# Altium PCB sm_Arm_Board.PcbDoc
Units mil, origin at the board's own origin, x right, y up, seen from the top; angles counter-clockwise.
Board outline 1531 x 1354 mil, 2 copper layers (Top Layer, Bottom Layer); 15 components, 21 nets, 85 pads, 16 vias.
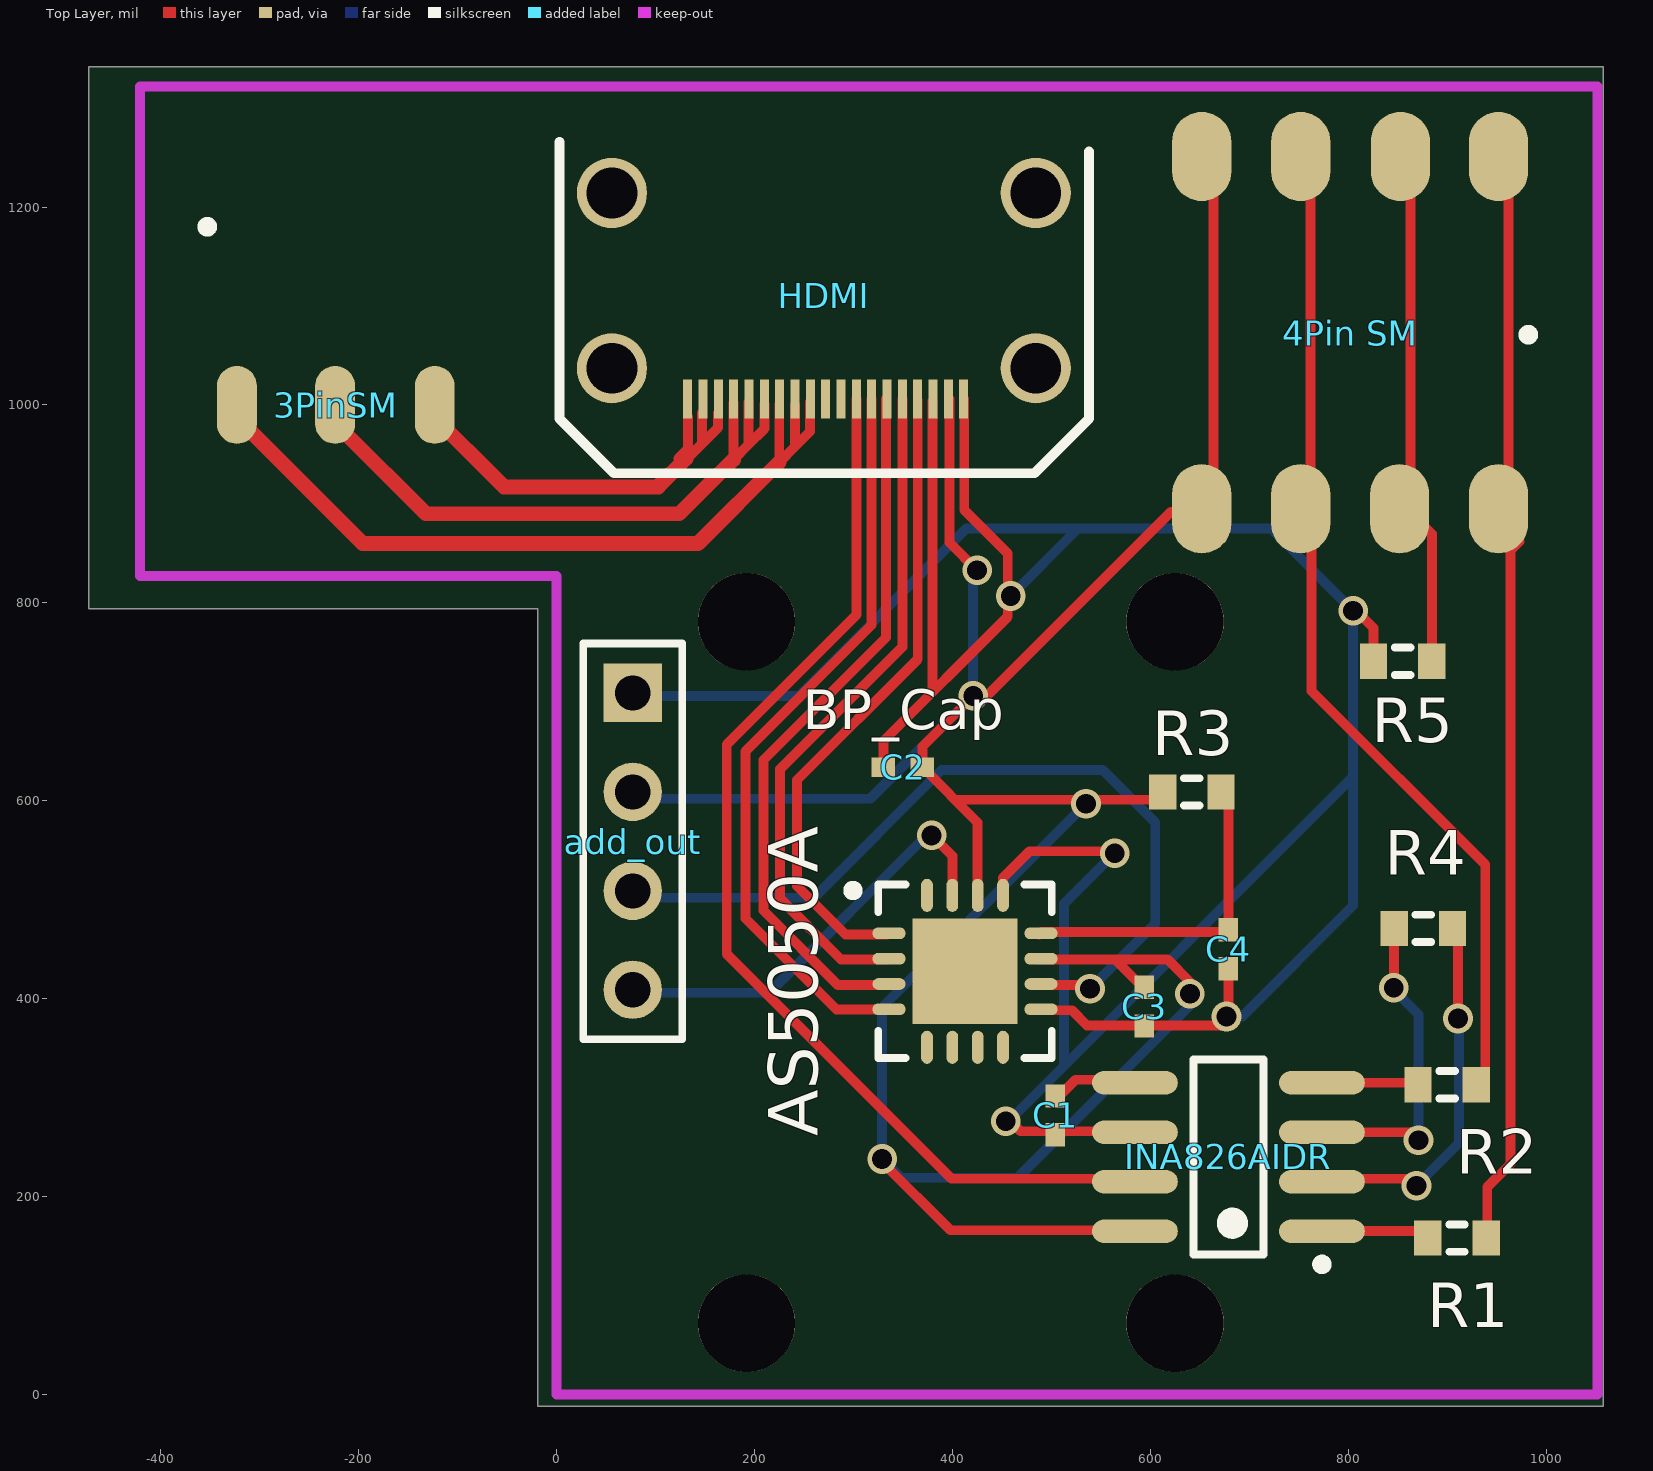
[diagram p0: Top Layer view]
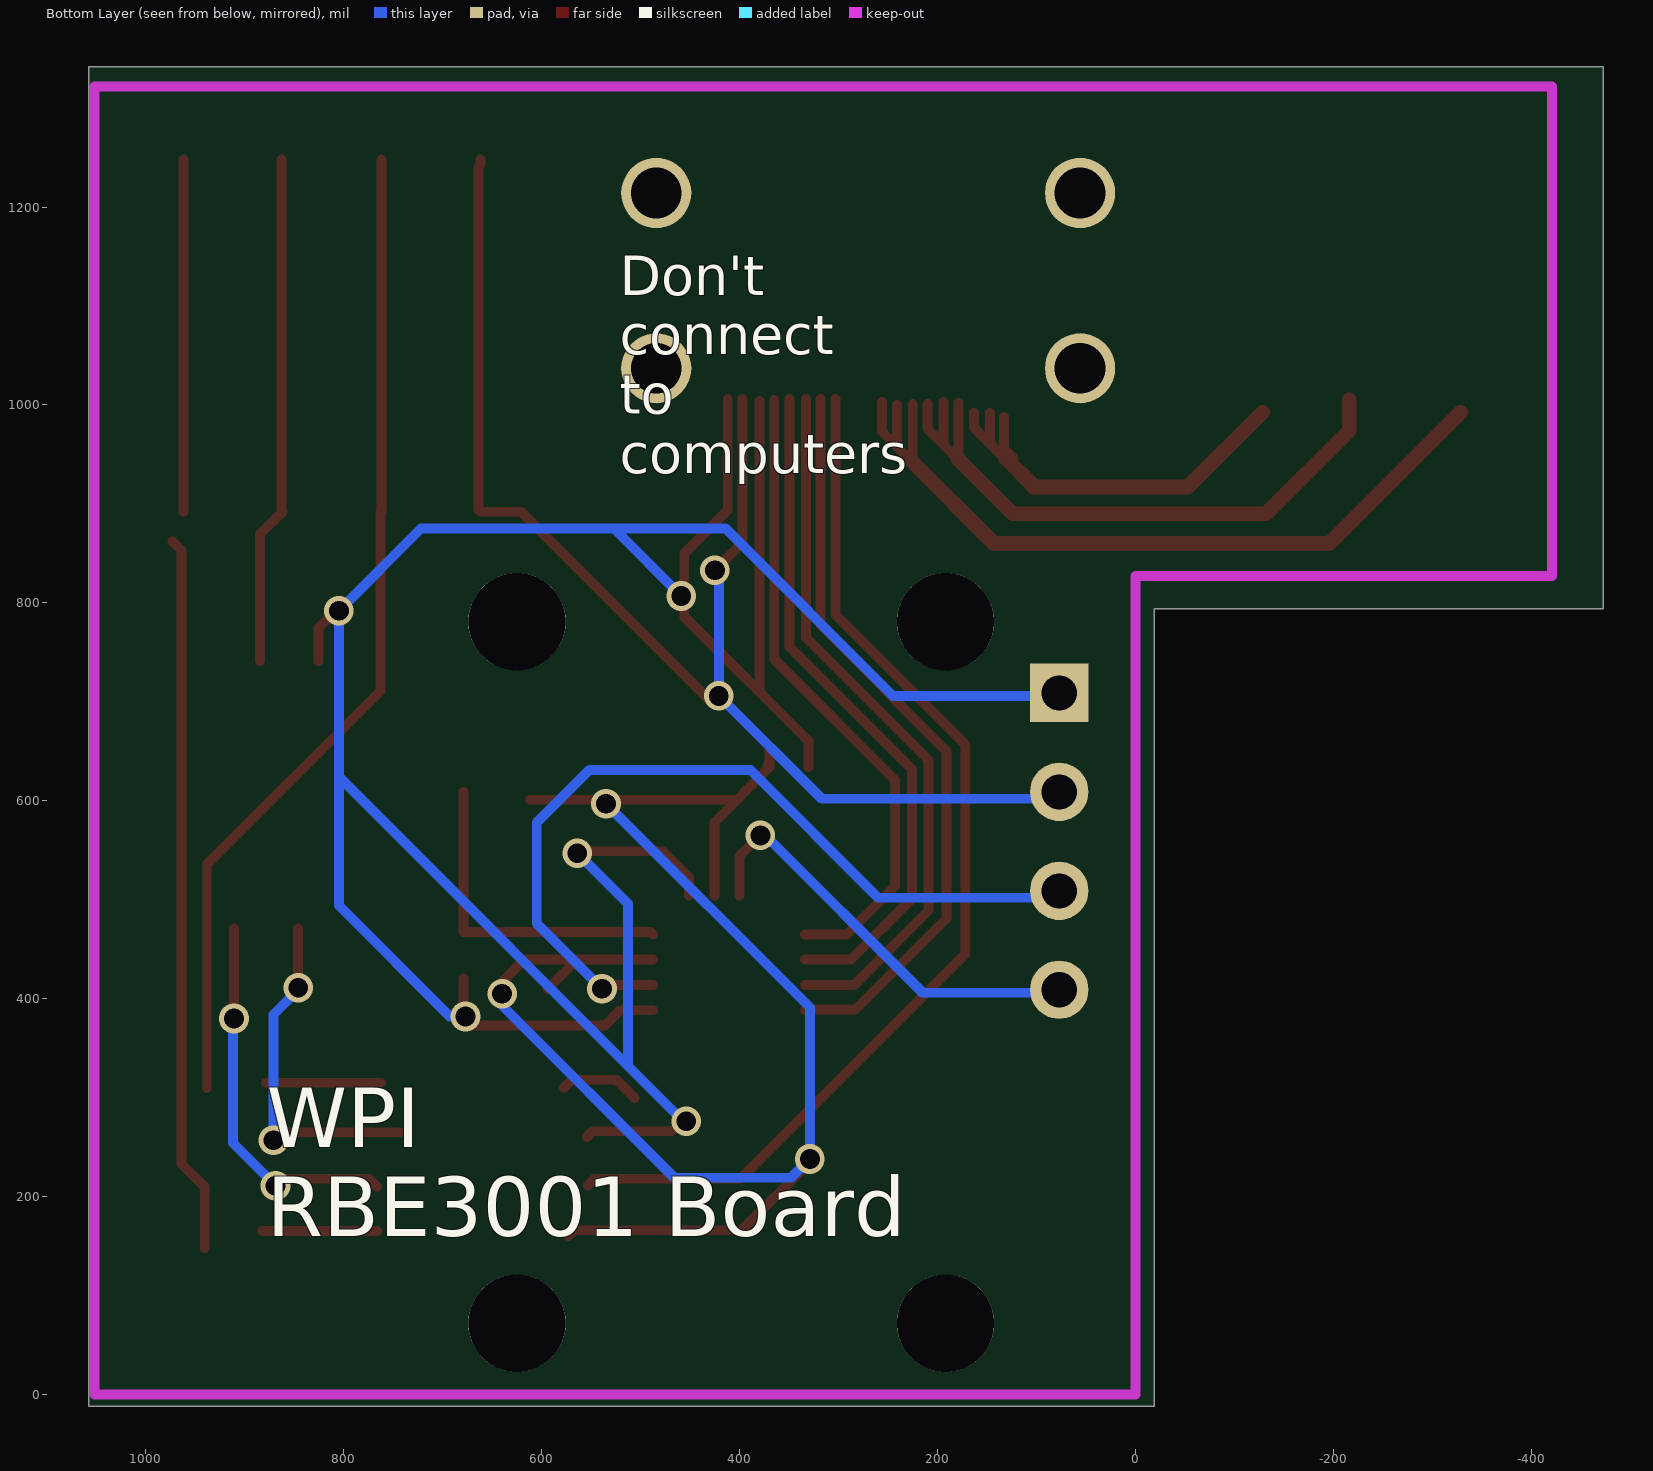
[diagram p1: Bottom Layer view, seen from below]

## Layer stack, top to bottom
Top Solder: solder mask 0.4, Solder Resist, Dk 3.5
Top Layer: signal copper 1.4
Dielectric 1: dielectric 12.6, FR-4, Dk 4.8
Bottom Layer: signal copper 1.4
Bottom Solder: solder mask 0.4, Solder Resist, Dk 3.5

## Board outline
-19,794 -19,-12 188,-12 1058,-12 1058,1342 -473,1342 -473,794

## Design rules (kind name [scope] priority, off if disabled: settings)
Clearance Clearance_1 [(InNet('MOTOR_GND') AND InNet('MOTOR_SIG') AND InNet('MOTOR_VCC'))] p1: gap=12
Clearance [All] p2: gap=4
ComponentClearance [All] p1: gap=10 collisioncheckmode=3 verticalgap=8 showdistances=FALSE
MinimumSolderMaskSliver [All] p1: minsoldermaskwidth=8
PolygonConnect [All] p1: connectstyle=Relief reliefconductorwidth=10 reliefentries=4 polygonreliefangle="90 Angle" airgapwidth=10
RoutingVias [All] p1: holewidth=28 width=50 viastyle="Through Hole" minholewidth=28 minwidth=50 maxholewidth=28 maxwidth=50
SolderMaskExpansion [All] p1: expansion=4
Width [(InNet('MOTOR_GND') AND InNet('MOTOR_SIG') AND InNet('MOTOR_VCC'))] p1: maxlimit=18 minlimit=10 preferedwidth=15
Width Width_1 [All] p2: maxlimit=18 minlimit=10 preferedwidth=10
28 further rules are at their usual default settings.

## Classes and differential pairs
component class sm_Arm_Board: 3PinSM "4Pin SM" AS5050A C1 C2 C3 C4 HDMI INA826AIDR R1 R2 R3 R4 R5

## Components (designator, comment, footprint, x,y, rotation, side; value= is the part's Value field where it differs from the comment)
3PinSM "Motor" 4PinSM -493,845 r0 top
"4Pin SM" "LoadCell" SOIC127P370X135-2N 952,1251 r180 top
add_out "Header 4" HDR1X4 77,709 r270 top
AS5050A "AS5050A" AS5050A 336,466 r0 top
C1 "Cap Semi" 0402 504,282 r90 top
C2 "Cap Semi" 0402 350,634 r0 top
C3 "Cap Semi" 0402 594,392 r90 top
C4 "Cap Semi" 0402 679,450 r90 top
HDMI "HDMI_Connector" 685119136923 128,976 r0 top
INA826AIDR "INA826AIDR" TI-D8_N 679,240 r180 top
R1 "Res3" J1-0603 910,158 r180 top
R2 "Res3" J1-0603 900,313 r180 top
R3 "Res3" J1-0603 642,609 r180 top
R4 "Res3" J1-0603 876,471 r0 top
R5 "Bias" J1-0603 855,741 r0 top

## Footprints (in the part's own frame and the unit in brackets; to place one, negate y for a bottom-side part, rotate by r counter-clockwise, add the part's x,y. Pads: shape width x height; smd on the part's side, far side on the other; paste and mask are expansions set on the pad)
4PinSM [mm]
  oval 1.02x2 smd: 3P1(9.398,3.937) 3P2(6.838,3.937) 3P3(4.318,3.937)
  silkscreen extent 3.43,8.38 3.68,8.64
0402 [mm] "Chip Capacitor, Body 1.0x0.5mm, IPC High Density"
  rect 0.6x0.5 smd: 1(-0.5,0) 2(0.5,0)
  body extent -0.55,-0.3 0.55,0.3, height 1.3
685119136923 [mm] "19 pad, 1mmx.23mm, .4mm pitch"
  round 1.8 hole 1.3: 1(-1.83,1.55) 1(-1.83,6.05) 1(9.05,1.55) 1(9.05,6.05)
  rect 0.23x1 smd: hdmi_1(0.115,0.762) hdmi_2(0.506,0.762) hdmi_3(0.902,0.762) hdmi_4(1.295,0.762) hdmi_5(1.689,0.762) hdmi_6(2.083,0.762) hdmi_7(2.476,0.762) hdmi_8(2.869,0.762) hdmi_9(3.263,0.762) hdmi_10(3.657,0.762) hdmi_11(4.05,0.762) hdmi_12(4.443,0.762) hdmi_13(4.837,0.762) hdmi_14(5.231,0.762) hdmi_15(5.624,0.762) hdmi_16(6.017,0.762) hdmi_17(6.411,0.762) hdmi_18(6.804,0.762) hdmi_19(7.198,0.762)
  silkscreen extent -3.17,-1.14 10.41,7.37
AS5050A [mm]
  oval 0.85x0.3 smd: 1(0,0) 2(0,-0.65) 3(0,-1.3) 4(0,-1.95) 9(3.9,-1.95) 10(3.9,-1.3) 11(3.9,-0.65) 12(3.9,0)
  oval 0.3x0.85 smd: 5(0.975,-2.925) 6(1.625,-2.925) 7(2.275,-2.925) 8(2.925,-2.925) 13(2.925,0.975) 14(2.275,0.975) 15(1.625,0.975) 16(0.975,0.975)
  rect 2.7x2.7 smd: 17(1.95,-0.975)
  silkscreen extent -1.05,-3.2 4.18,1.25, body extent -0.13,-3.05 4.03,1.1, height 0.9
HDR1X4 [mm] "Connector; Header; 4 Position"
  rect 1.5x1.5 hole 0.9: 1(0,0)
  round 1.5 hole 0.9: 2(2.54,0) 3(5.08,0) 4(7.62,0)
  silkscreen extent -1.27,-1.27 8.89,1.27
J1-0603 [mm] "Chip Resistor, Body 1.6x0.8mm, IPC High Density"
  rect 0.7x0.9 smd: 1(-0.75,0) 2(0.75,0)
  silkscreen extent -0.2,-0.35 0.2,0.35, body extent -0.85,-0.48 0.85,0.48, height 0.9
SOIC127P370X135-2N [mm] "SOIC, 2-Leads, Body 1.55x2.70mm, Pitch 1.27mm, IPC Medium Density"
  oval 1.52x2.29 smd: 4P1(0,9.04) 4P1(0,0) 4P2(2.52,0) 4P2(2.54,9.04) 4P3(5.08,9.04) 4P3(5.08,0) 4P4(7.62,9.04) 4P4(7.62,0)
  silkscreen extent -0.89,4.45 -0.64,4.7
TI-D8_N [mm] "SOIC, 8-Leads, Body 5x4mm, Pitch 1.27mm, IPC Medium Density"
  oval 2.2x0.6 smd: 1(-2.4,1.905) 2(-2.4,0.635) 3(-2.4,-0.635) 4(-2.4,-1.905) 5(2.4,-1.905) 6(2.4,-0.635) 7(2.4,0.635) 8(2.4,1.905)
  silkscreen extent -2.53,-2.5 0.9,2.88, body extent -2,-2.5 2,2.5, height 1.75

## Part data
3PinSM: library part 3PinSM
"4Pin SM": library part 4PinSM
add_out: "Header, 4-Pin"
C1 C2 C3 C4: "Capacitor (Semiconductor SIM Model)"
INA826AIDR: "Precision, 200-uA Supply Current, 36-V Supply Instrumentation Amplifier, -40 to 125 degC, 8-pin SOIC (D8), Green (RoHS & no Sb/Br)"
R1 R2 R3 R4: "Resistor"
R5: library part Res3, "Resistor"

## Free pads (board coordinates)
  round 98.43 hole 98.43 unplated paste+0: 2(191.93,72) 2(191.93,781)
  round 98.43 hole 98.43 unplated: 2(625,72) 2(625,781)

## Via types
v1: diameter 30, hole 20, Top Layer to Bottom Layer, tented both sides, 16 vias

## Nets (pads, with @x,y where several pads share a name; then routed paths per layer and width w, separated by ;. In a path a pad name is that pad's centre, name@x,y a point inside that pad or via, vN(x,y) a via of type N, cw(c..) or ccw(c..) an arc to the next point about the centre after c; other vN are vias at no path point)
GND: add_out.1 AS5050A.9 AS5050A.13 C1.1 C2.1 C3.1 C4.1 HDMI.hdmi_17 HDMI.hdmi_19 INA826AIDR.6 R5.1 | length 3406.5
  Top Layer w10: C2.1 330.32,660.32 456,786 456,850 412,894 HDMI.hdmi_19@412,1006 ; 380,712 HDMI.hdmi_17@380,1004 ; AS5050A.13 451.16,522.16 478,549 562,549 v1(564,547) ; v1(454,276) 459,276 469,266 548.51,266 INA826AIDR.6@554.51,260 ; AS5050A.9@487.54,388.23 520.77,388.23 536,373 v1@679,373 ; v1@679,382 C4.1@679,420.31 ; v1@807,793 825.47,774.53 R5.1
  Bottom Layer w10: add_out.1@77,706 245,706 414,875 722,875 v1(805,792) 805,494 693,382 v1(677,382) ; v1@456.63,276 804.81,624.19 ; v1(459,807) 526.5,874.5 ; 513,334 513,496 v1(564,547)
MOTOR_GND: 3PinSM.3P2 HDMI.hdmi_4 HDMI.hdmi_5 HDMI.hdmi_6 | length 692
  Top Layer w10: 151,917 179,945 ; HDMI.hdmi_4@179,1002 179,945 ; HDMI.hdmi_5@194,1003 194,960 ; HDMI.hdmi_6@210,1001 210,976 194,960 ; 179,945 194,960
  Top Layer w15: 3PinSM.3P2@-216,1005 -216,974 -132,890 124,890 179,945
MOTOR_SIG: 3PinSM.3P3 HDMI.hdmi_7 HDMI.hdmi_8 HDMI.hdmi_9 | length 817.2
  Top Layer w10: HDMI.hdmi_7@225,1001 225,942 241,958 ; HDMI.hdmi_8@241,1000 241,958 ; HDMI.hdmi_9@256,1003 256,973 241,958
  Top Layer w15: 3PinSM.3P3@-328.5,992.5 -196,860 143,860 225,942
MOTOR_VCC: 3PinSM.3P1 HDMI.hdmi_1 HDMI.hdmi_2 HDMI.hdmi_3 | length 461
  Top Layer w10: 123,946 133,956 HDMI.hdmi_1@133,988 ; HDMI.hdmi_2@147,992 147,961 132,946 163,977 HDMI.hdmi_3@163,992
  Top Layer w15: 3PinSM.3P1@-128.5,992.5 -53,917 103,917 ; 102,917 131,946
"Net4Pin SM_4P1": "4Pin SM.4P1" R1.1 | length 1083.4
  Top Layer w10: R1.1@940.53,148 940.53,209.53 964,233 964,853 973,862 ; 962,892.09 962,1248
"Net4Pin SM_4P2": "4Pin SM.4P2" R5.2 | length 516.7
  Top Layer w10: 862.79,1248 862.79,892.88 862,892.09 884.53,869.57 R5.2
"Net4Pin SM_4P3": "4Pin SM.4P3" R2.1 | length 1011.2
  Top Layer w10: 762,892.09 762,1248 ; 763,892.09 763,711 938.53,535.47 R2.1@938.53,309.53
Netadd_out_3: add_out.3 AS5050A.10 | length 852
  Top Layer w10: AS5050A.10@487.54,413.82 v1@532.82,413.82
  Bottom Layer w10: add_out.3@69,502 260,502 389,631 552,631 605,578 605,476 v1(539,410)
Netadd_out_4: add_out.4 AS5050A.15 | length 439.2
  Top Layer w10: v1(379,565) 399.98,544.02 AS5050A.15
  Bottom Layer w10: add_out.4@77,406 215,406 v1@379,570
NetAS5050A_1: AS5050A.1 HDMI.hdmi_16 | length 652.8
  Top Layer w10: AS5050A.1@334,465 292,465 243,514 243,621 365,743 HDMI.hdmi_16@365,1005
NetAS5050A_2: AS5050A.2 HDMI.hdmi_15 | length 689.6
  Top Layer w10: AS5050A.2@334,439.41 287.59,439.41 226,501 226,632 349.42,755.42 HDMI.hdmi_15
NetAS5050A_3: AS5050A.3 HDMI.hdmi_14 | length 724.5
  Top Layer w10: HDMI.hdmi_14@333,1006 333,765 209,641 209,489 284.18,413.82 AS5050A.3@334,413.82
NetAS5050A_4: AS5050A.4 HDMI.hdmi_13 | length 759.2
  Top Layer w10: HDMI.hdmi_13 318.43,777.43 191,650 191,481 283,389 333.23,389 AS5050A.4@334,388.23
NetAS5050A_12: AS5050A.12 C4.2 R3.1 | length 334
  Top Layer w10: AS5050A.12@487.54,465 489.95,467.41 679,467.41 R3.1@679,609
NetC1_2: C1.2 INA826AIDR.5 | length 82.4
  Top Layer w10: C1.2@506,299.69 524.31,318 569.51,318 INA826AIDR.5@577.51,310
NetHDMI_hdmi_12: HDMI.hdmi_12 INA826AIDR.7 | length 1093.7
  Top Layer w10: HDMI.hdmi_12@303,1006 303,788 172,657 172,445 399,218 546.51,218 INA826AIDR.7@553.51,211
NetINA826AIDR_1: INA826AIDR.1 R1.2 | length 116
  Top Layer w10: INA826AIDR.1@766.49,165 R1.2@882.47,165
NetINA826AIDR_2: INA826AIDR.2 R4.2 | length 376.5
  Top Layer w10: INA826AIDR.2@766.49,210 774.49,218 862,218 v1(869,211) ; v1(911,380) R4.2@911,471
  Bottom Layer w10: v1(869,211) 912,254 v1@912,370
NetINA826AIDR_3: INA826AIDR.3 R4.1 | length 355.5
  Top Layer w10: INA826AIDR.3@743,265 INA826AIDR.3 863,265 v1(871,257) ; v1@846.47,420.47 R4.1
  Bottom Layer w10: v1@838,417 871,384 v1(871,257)
  other v1: 846,411
NetINA826AIDR_4: INA826AIDR.4 R2.2 | length 116
  Top Layer w10: INA826AIDR.4@762.49,315 R2.2@878.47,315
VCC: "4Pin SM.4P4" add_out.2 AS5050A.11 AS5050A.14 C2.2 C3.2 HDMI.hdmi_18 INA826AIDR.8 R3.2 | length 3180.7
  Top Layer w10: v1(329,238) 329,235 398,166 567,166 INA826AIDR.8@573,160 ; HDMI.hdmi_18@397,1006 397,861 v1(425,833) ; 403.69,601 R3.2@612,601 ; AS5050A.14 425.57,578.12 C2.2 369.69,654.69 v1(421,706) v1@432,706 ; v1@428,699 621.09,892.09 662,892.09 ; AS5050A.11@487.54,439.41 564.28,439.41 ; C3.2@594,409.69 564.28,439.41 ; v1(640,405) 640,417 617.59,439.41 564.28,439.41 ; 662,1248 662,1243 664,1241 664,894.09
  Bottom Layer w10: add_out.2@77,602 317,602 v1(421,706) 421,835 423,833 v1(425,833) ; v1(535,597) 329,391 v1(329,238) 348,219 466,219 640,393 v1(640,405)
pads on no net: AS5050A.5 AS5050A.6 AS5050A.7 AS5050A.8 AS5050A.16 AS5050A.17 HDMI.1 HDMI.hdmi_10 HDMI.hdmi_11

## Keep-outs
Keep-Out Layer:
  lines w10: -421,827 -421,1322 1052,1322 1052,0 0,0 0,827 -421,827

## Silkscreen, mask and mechanical layers (free items; w line width, h text height)
Top Overlay:
  text "BP_Cap" at 249,672 h40
Bottom Overlay:
  text "Don't / connect / to / computers" at 521,931 h40
  text "WPI / RBE3001 Board" at 878,160 h60